# EAGLE board CapstoneProject16_latest_board_v2 (EAGLE 7.5.0)
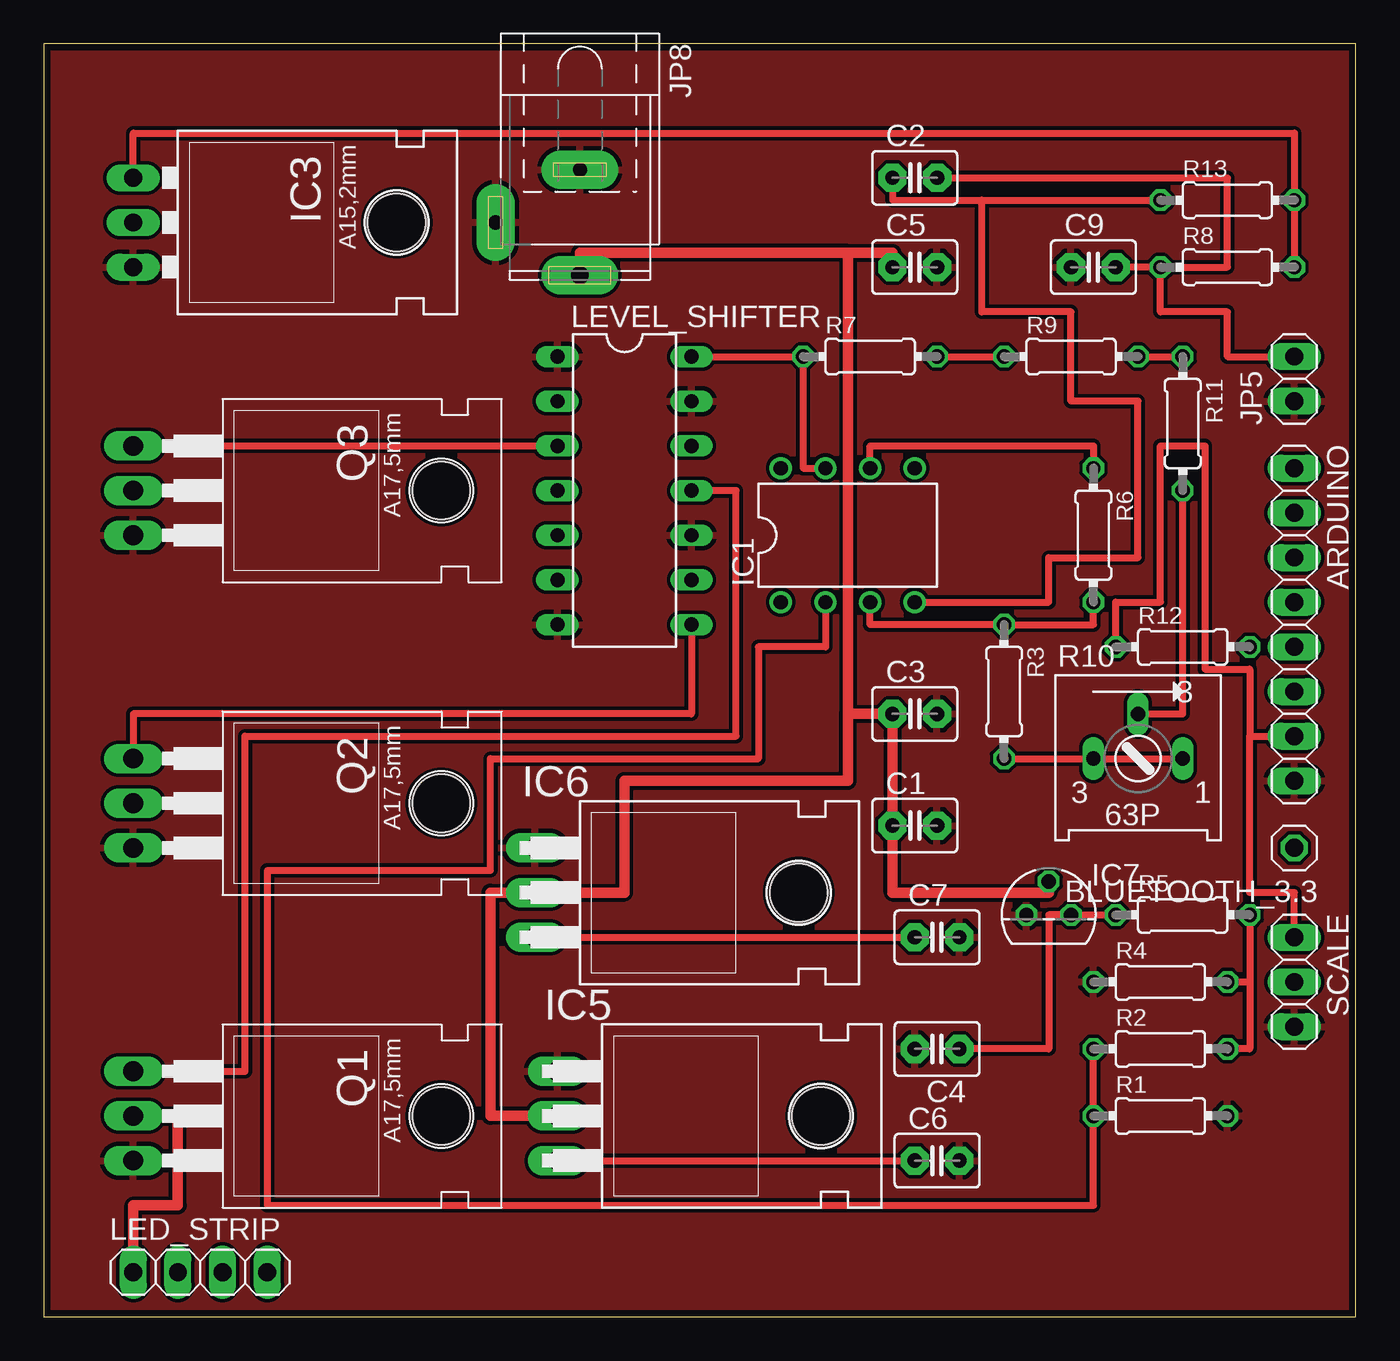
[diagram p0: board, top side]
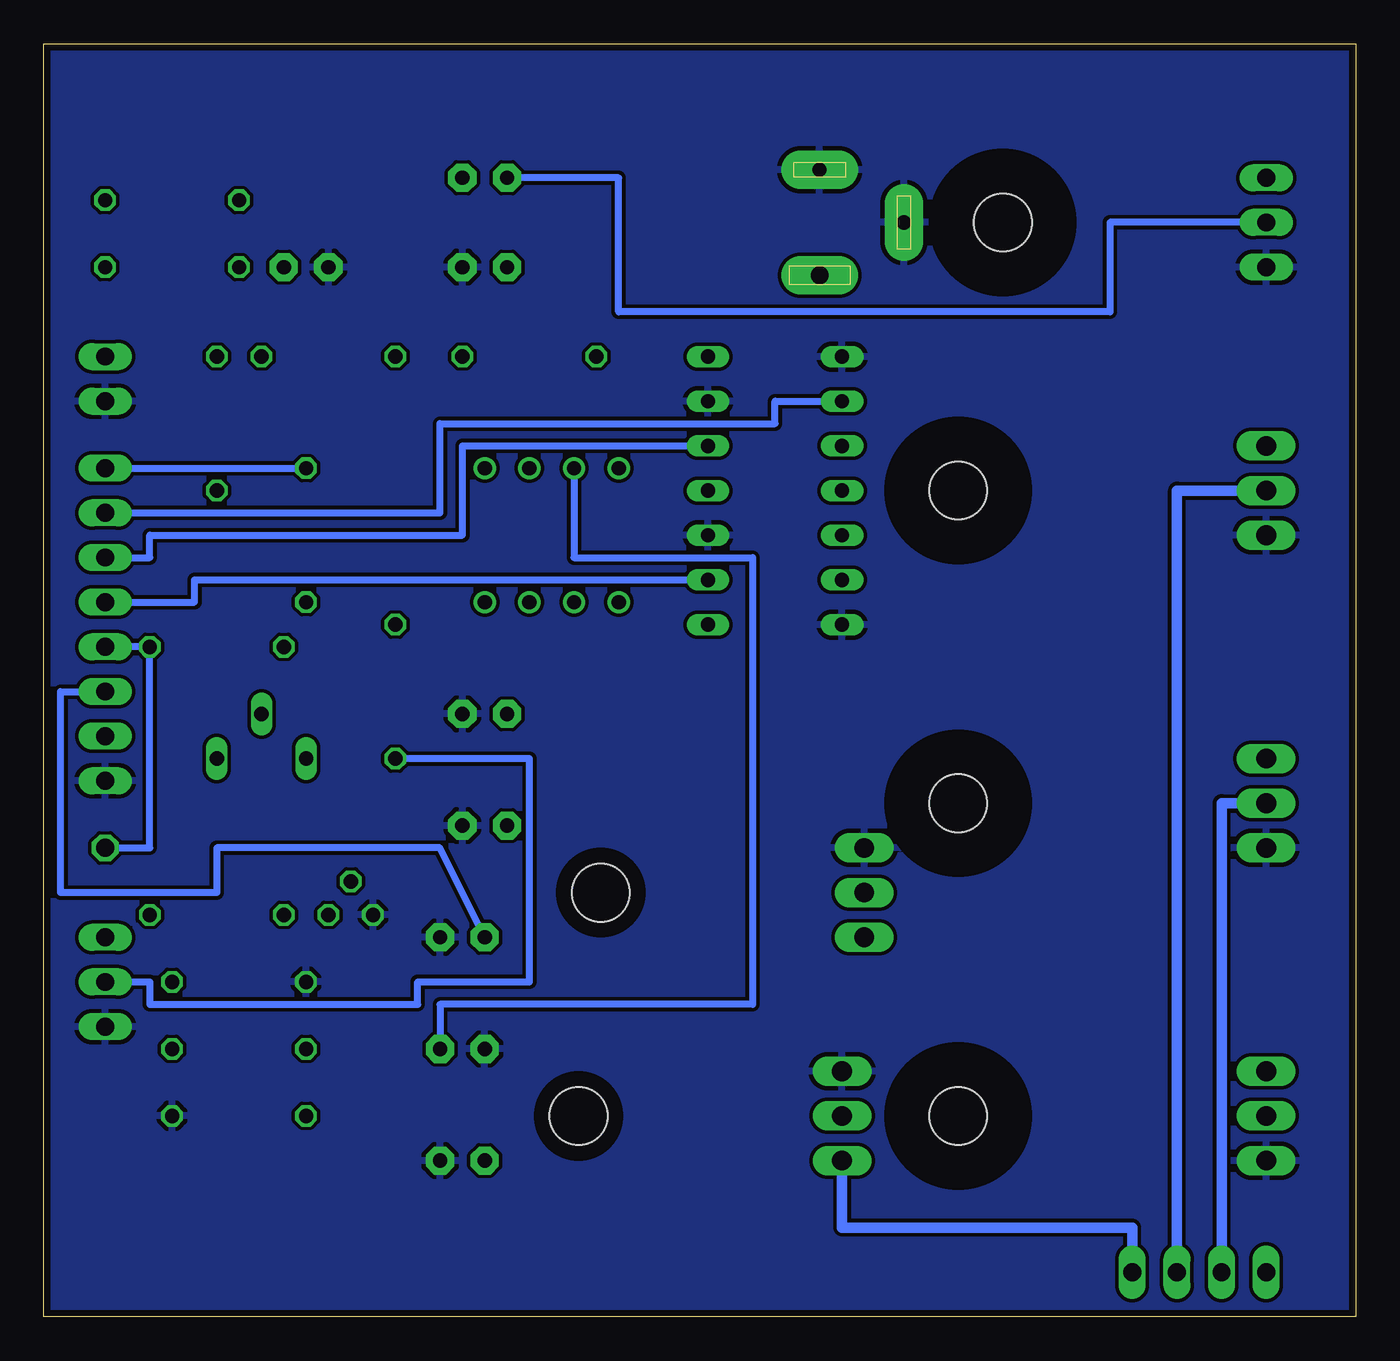
[diagram p1: board, bottom side, seen from below]

Size 74.6 x 72.38 mm. Coordinates in mm from the lower left corner, seen from the top.
Outline: 0,0 74.6,0 74.6,72.38 0,72.38 0,0
Copper layers (1*16): Top 0.0178mm / dielectric 59mil / Bottom 0.0178mm
Design rules "epl-lpkf": minimum track width 8mil, minimum drill 0.35mm, track to track 8mil, track to pad 8mil, pad to pad 8mil, via to via 8mil, smd to smd 8mil, copper to edge 15mil, drill to drill 15mil, minimum pad ring 8mil, minimum via ring 8mil, stop-mask expansion 3mil, vias tented up to drill 0mil, thermal gap 10mil

## Footprints (pad centres in the part's own frame; a part is rotated, then mirrored left to right if it is on the bottom)
1X08 = drill 1.016 long: 1 -8.89,0; 2 -6.35,0; 3 -3.81,0; 4 -1.27,0; 5 1.27,0; 6 3.81,0; 7 6.35,0; 8 8.89,0
1X01 = drill 1.016 octagon: 1 0,0
C2.5-3 = drill 0.813 pad 1.6 octagon: 1 -1.27,0; 2 1.27,0
DIL08 = drill 0.813 pad 1.27: 1 -3.81,-3.81; 2 -1.27,-3.81; 3 1.27,-3.81; 4 3.81,-3.81; 5 3.81,3.81; 6 1.27,3.81; 7 -1.27,3.81; 8 -3.81,3.81
TO220L1 = drill 1.016 long: 1 -2.54,-3.81; 2 0,-3.81; 3 2.54,-3.81 | hole 3.302: 0,11.176
TO220H = drill 1.118 long: 1 -2.54,-10.16; 2 0,-10.16; 3 2.54,-10.16 | hole 3.302: 0,4.826
TO92 = drill 0.813 octagon: 1 -1.27,0; 2 0,1.905; 3 1.27,0
1X02 = drill 1.016 long: 1 -1.27,0; 2 1.27,0
SPC4078 = drill 0.8 pad 2.184 long: 1 -3,0; 2 0,-4.8 | drill 1 pad 2.184 long: 3 3,0
1X04 = drill 1.016 long: 1 -3.81,0; 2 -1.27,0; 3 1.27,0; 4 3.81,0
DIL14 = drill 0.813 long: 1 -7.62,-3.81; 2 -5.08,-3.81; 3 -2.54,-3.81; 4 0,-3.81; 5 2.54,-3.81; 6 5.08,-3.81; 7 7.62,-3.81; 8 7.62,3.81; 9 5.08,3.81; 10 2.54,3.81; 11 0,3.81; 12 -2.54,3.81; 13 -5.08,3.81; 14 -7.62,3.81
TO220 = drill 1.118 long: 1 -2.54,-6.35; 2 0,-6.35; 3 2.54,-6.35 | hole 3.302: 0,11.176
0204/7 = drill 0.813 octagon: 1 -3.81,0; 2 3.81,0
S63P = drill 0.813 long: A 2.54,0; E -2.54,0; S 0,2.54
1X03 = drill 1.016 long: 1 -2.54,0; 2 0,0; 3 2.54,0

## Placement (x,y rotation side)
ARDUINO  [1X08]  71.12,39.37 270 top
BLUETOOTH_3.3  [1X01]  71.12,26.67 180 top
C1  0.33uF  [C2.5-3]  49.53,27.94 0 top
C2  0.33uF  [C2.5-3]  49.53,64.77 0 top
C3  0.33uF  [C2.5-3]  49.53,34.29 0 top
C4  0.1uF  [C2.5-3]  50.8,15.24 180 top
C5  0.33uF  [C2.5-3]  49.53,59.69 0 top
C6  0.1uF  [C2.5-3]  50.8,8.89 0 top
C7  0.1uF  [C2.5-3]  50.8,21.59 0 top
C9  0.33uF  [C2.5-3]  59.69,59.69 0 top
IC1  LM741P  [DIL08]  45.72,44.45 0 top
IC3  LM317MABT  [TO220L1]  8.89,62.23 270 top
IC5  [TO220H]  39.37,11.43 270 top
IC6  [TO220H]  38.1,24.13 270 top
IC7  [TO92]  57.15,22.86 0 top
JP5  9V  [1X02]  71.12,53.34 90 top
JP8  [SPC4078]  30.48,62.23 270 top
LED_STRIP  [1X04]  8.89,2.54 0 top
LEVEL_SHIFTER  [DIL14]  33.02,46.99 270 top
Q1  IRF620  [TO220]  11.43,11.43 270 top
Q2  IRF620  [TO220]  11.43,29.21 270 top
Q3  IRF620  [TO220]  11.43,46.99 270 top
R1  33k  [0204/7]  63.5,11.43 0 top
R2  1k  [0204/7]  63.5,15.24 0 top
R3  1k  [0204/7]  54.61,35.56 270 top
R4  6.8k  [0204/7]  63.5,19.05 0 top
R5  6.8k  [0204/7]  64.77,22.86 0 top
R6  33k  [0204/7]  59.69,44.45 270 top
R7  560  [0204/7]  46.99,54.61 0 top
R8  270  [0204/7]  67.31,59.69 0 top
R9  39  [0204/7]  58.42,54.61 0 top
R10  [S63P]  62.23,31.75 0 top
R11  470  [0204/7]  64.77,50.8 270 top
R12  1k  [0204/7]  64.77,38.1 0 top
R13  150  [0204/7]  67.31,63.5 0 top
SCALE  [1X03]  71.12,19.05 270 top

## Library data of the parts
ARDUINO BLUETOOTH_3.3 JP5 LED_STRIP SCALE = pinhead
C1-C7 C9 = capacitor-wima
IC1 IC5-IC7 = linear
IC3 = v-reg
JP8 = con-jack; OC_FARNELL: unknown; OC_NEWARK: unknown
LEVEL_SHIFTER = ic-package
Q1-Q3 = transistor-fet
R1-R9 R11-R13 = resistor
R10 = pot

## Nets
5V: C4.1 IC1.7 IC7.3 LEVEL_SHIFTER.14 R5.1 R7.1
12V: C6.1 IC5.3 LED_STRIP.4
19V: C1.1 C3.1 C5.1 IC5.2 IC6.2 IC7.2 JP8.3
-5V: C2.1 IC1.4 IC3.2 R13.1
DUE1: ARDUINO.1 IC1.6 R6.1
DUE2: ARDUINO.2 LEVEL_SHIFTER.2
DUE3: ARDUINO.3 LEVEL_SHIFTER.12
DUE4: ARDUINO.4 LEVEL_SHIFTER.9
DUE5: ARDUINO.5 BLUETOOTH_3.3.1 R12.2
DUE6: ARDUINO.6 C7.1 IC6.3
DUE7: ARDUINO.7 R12.1 SCALE.1
GND: ARDUINO.8 C1.2 C3.2 C4.2 C5.2 C6.2 C7.2 C9.1 IC3.3 IC5.1 IC6.1 IC7.1 JP5.1 JP8.1 JP8.2 LEVEL_SHIFTER.1 LEVEL_SHIFTER.7 LEVEL_SHIFTER.10 LEVEL_SHIFTER.13 Q1.3 Q2.3 Q3.3 R1.2 R4.1 SCALE.3
LED_B: LED_STRIP.3 Q3.2
LED_G: LED_STRIP.2 Q2.2
LED_R: LED_STRIP.1 Q1.2
N$2: R2.2 R4.2 R5.2
N$3: IC1.2 R1.1 R2.1
N$4: IC1.3 R3.1 R6.2
N$5: LEVEL_SHIFTER.4
N$6: R10.S R11.2
N$8: LEVEL_SHIFTER.5
N$9: R7.2 R9.1
N$10: LEVEL_SHIFTER.6
N$12: C2.2 C9.2 JP5.2 R8.1
N$13: IC3.1 R8.2 R13.2
N$15: R9.2 R11.1
N$27: LEVEL_SHIFTER.11 Q1.1
N$28: LEVEL_SHIFTER.8 Q2.1
N$29: LEVEL_SHIFTER.3 Q3.1
N$31: IC1.1
N$33: IC1.8
SCALE1: R3.2 R10.A R10.E SCALE.2

## Tracks (layer width: path | path; a pad name or v marks a point on that pad's centre or on a via)
5V
  Top 0.406: R5.1 IC7.3 57.15,22.86 57.15,15.24 C4.1 | LEVEL_SHIFTER.14 R7.1 43.18,48.26 IC1.7
  Bottom 0.406: IC1.7 44.45,43.18 34.29,43.18 34.29,17.78 52.07,17.78 C4.1
12V
  Top 0.406: IC5.3 C6.1
  Bottom 0.61: LED_STRIP.4 12.7,5.08 29.21,5.08 IC5.3
19V
  Top 0.61: 45.72,60.5 48.26,60.5 C5.1 | IC7.2 57.15,24.13 48.26,24.13 C1.1 C3.1 45.72,34.29 | 45.72,60.5 45.72,34.29 | IC5.2 25.4,11.43 25.4,24.13 IC6.2 33.02,24.13 33.02,30.48 45.72,30.48 45.72,34.29 | 45.72,60.5 30.48,60.5 JP8.3
-5V
  Top 0.406: C2.1 48.26,63.5 53.34,63.5 | 53.34,63.5 R13.1 | IC1.4 57.15,40.64 57.15,43.18 62.23,43.18 62.23,52.07 58.42,52.07 58.42,57.15 53.34,57.15 53.34,63.5
  Bottom 0.406: IC3.2 13.97,62.23 13.97,57.15 41.91,57.15 41.91,64.77 C2.1
DUE1
  Top 0.406: IC1.6 46.99,49.53 59.69,49.53 R6.1
  Bottom 0.406: ARDUINO.1 R6.1
DUE2
  Bottom 0.406: ARDUINO.2 52.07,45.72 52.07,50.8 33.02,50.8 33.02,52.07 LEVEL_SHIFTER.2
DUE3
  Bottom 0.406: ARDUINO.3 68.58,43.18 68.58,44.45 50.8,44.45 50.8,49.53 LEVEL_SHIFTER.12
DUE4
  Bottom 0.406: ARDUINO.4 66.04,40.64 66.04,41.91 LEVEL_SHIFTER.9
DUE5
  Bottom 0.406: ARDUINO.5 R12.2 68.58,26.67 BLUETOOTH_3.3.1
DUE6
  Top 0.406: IC6.3 C7.1
  Bottom 0.406: C7.1 52.07,26.67 64.77,26.67 64.77,24.13 73.66,24.13 73.66,35.56 ARDUINO.6
DUE7
  Top 0.406: R12.1 60.96,40.64 63.5,40.64 63.5,49.53 66.04,49.53 66.04,36.83 68.58,36.83 68.58,33.02 | 68.58,33.02 ARDUINO.7 | SCALE.1 71.12,24.13 68.58,24.13 68.58,33.02
GND
  pour Bottom: 0,74.93 -1.27,74.93 -1.27,-8.89 101.6,-8.89 101.6,-7.62 101.6,74.93
  pour Top: -1.27,74.93 -1.27,-8.89 101.6,-8.89 101.6,74.93
LED_B
  Bottom 0.61: LED_STRIP.3 10.16,46.99 Q3.2
LED_G
  Bottom 0.61: LED_STRIP.2 7.62,29.21 Q2.2
LED_R
  Top 0.61: LED_STRIP.1 5.08,6.35 7.62,6.35 7.62,11.43 Q1.2
N$2
  Top 0.406: R5.2 68.58,19.05 | 68.58,19.05 68.58,15.24 R2.2 | R4.2 68.58,19.05
N$3
  Top 0.406: R2.1 R1.1 59.69,6.35 12.7,6.35 12.7,25.4 25.4,25.4 25.4,31.75 40.64,31.75 40.64,38.1 44.45,38.1 IC1.2
N$4
  Top 0.406: IC1.3 46.99,39.37 R3.1 59.69,39.37 R6.2
N$6
  Top 0.406: R10.S 64.77,34.29 R11.2
N$9
  Top 0.406: R7.2 R9.1
N$12
  Top 0.406: C2.2 67.31,64.77 67.31,59.69 R8.1 | R8.1 C9.2 | JP5.2 67.31,54.61 67.31,57.15 63.5,57.15 R8.1
N$13
  Top 0.406: R8.2 R13.2 71.12,67.31 5.08,67.31 IC3.1
N$15
  Top 0.406: R9.2 R11.1
N$27
  Top 0.406: Q1.1 11.43,13.97 11.43,33.02 39.37,33.02 39.37,46.99 LEVEL_SHIFTER.11
N$28
  Top 0.406: LEVEL_SHIFTER.8 36.83,34.29 5.08,34.29 Q2.1
N$29
  Top 0.406: Q3.1 LEVEL_SHIFTER.3
SCALE1
  Top 0.406: R3.2 R10.E R10.A
  Bottom 0.406: SCALE.2 68.58,19.05 68.58,17.78 53.34,17.78 53.34,19.05 46.99,19.05 46.99,31.75 R3.2